# EAGLE board PIC32 (EAGLE 9.3.0)
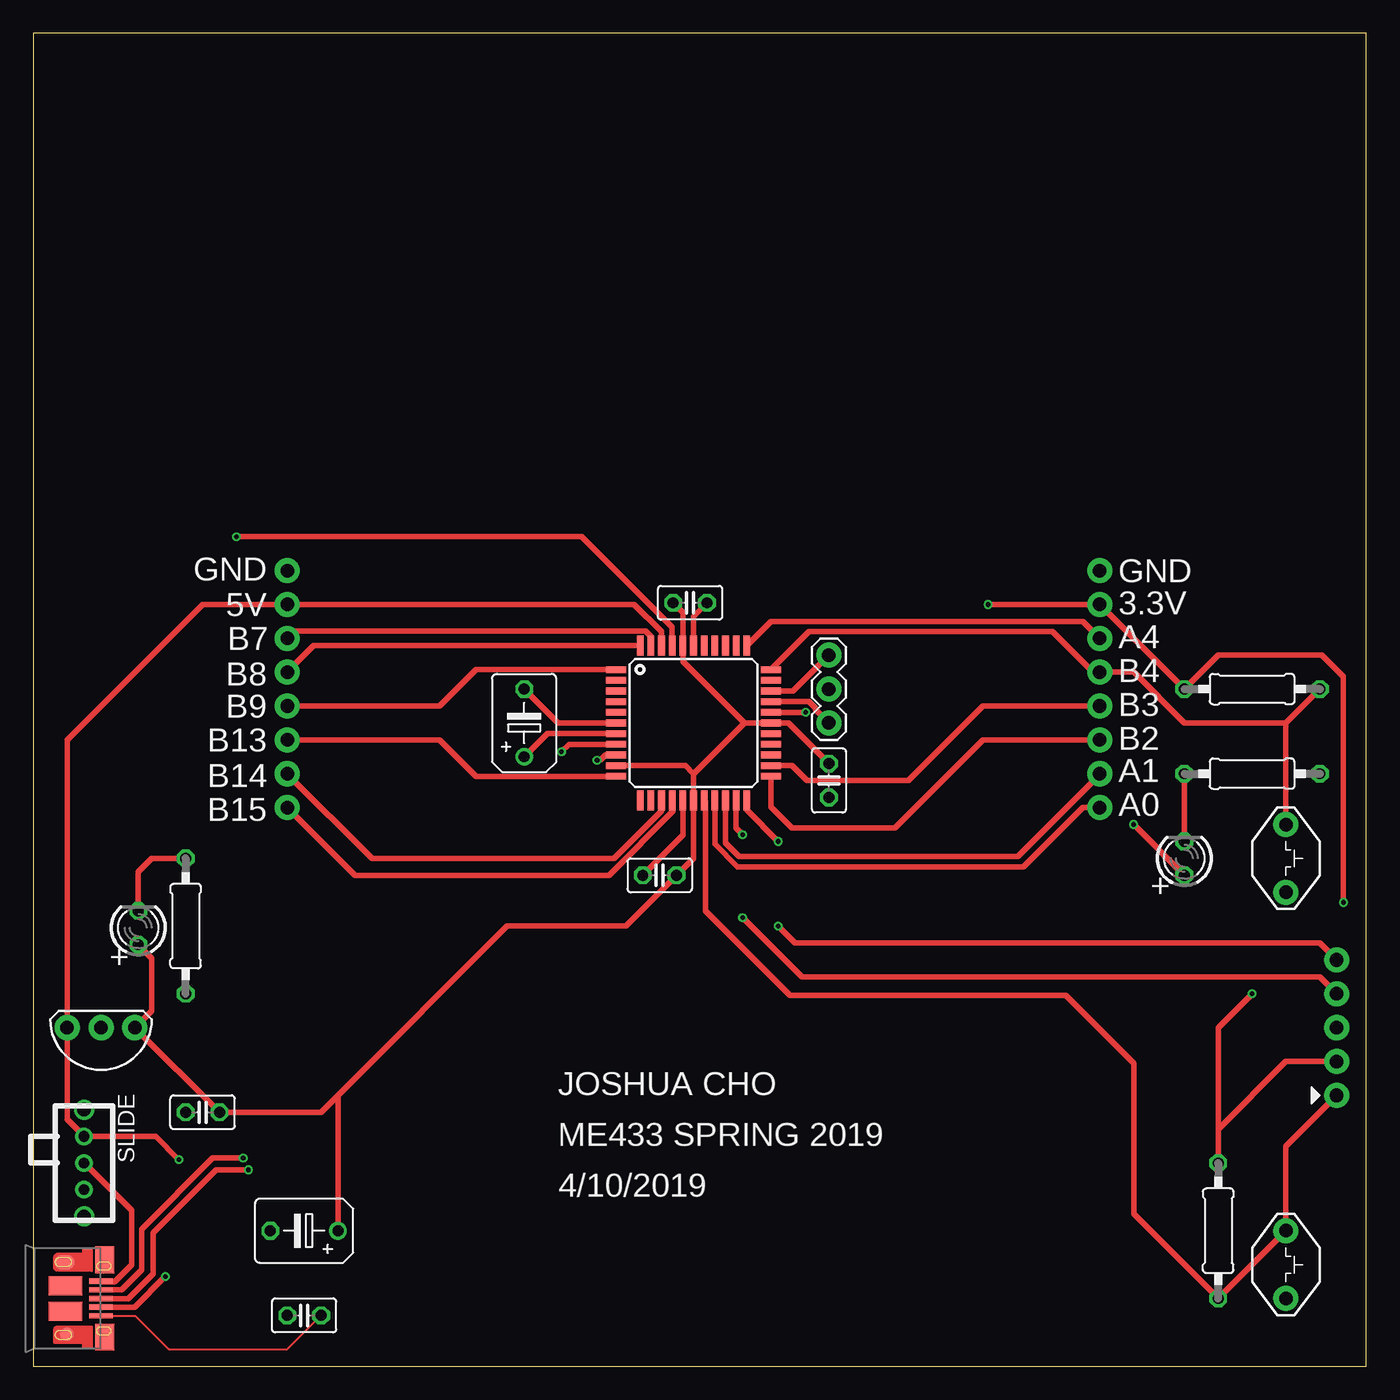
[diagram p0: board, top side]
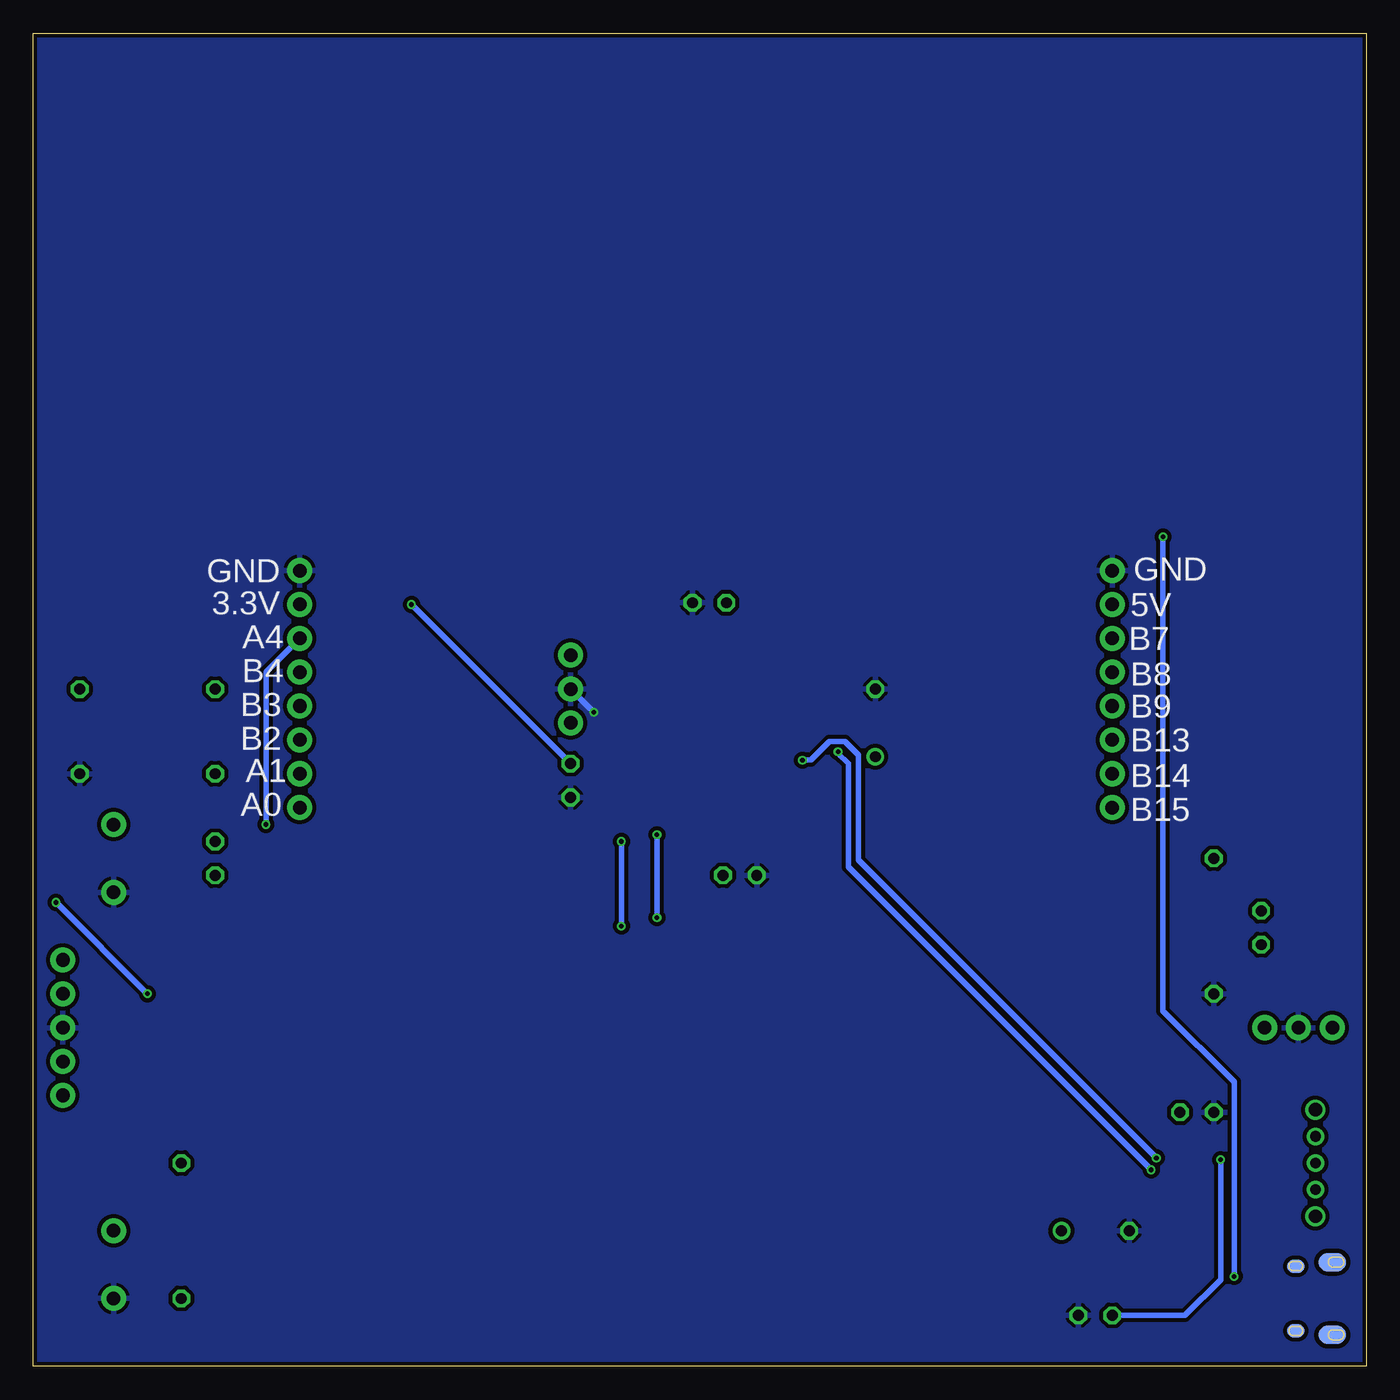
[diagram p1: board, bottom side, seen from below]

Size 100 x 100 mm. Coordinates in mm from the lower left corner, seen from the top.
Outline: 0,0 100,0 100,100 0,100 0,0
Copper layers (1*16): Top 0.035mm / dielectric 1.5mm / Bottom 0.035mm
Design rules "SeeedStudio_2layer_DRU_no_angle_20140221": minimum track width 6mil, minimum drill 12mil, track to track 6mil, track to pad 6mil, pad to pad 6mil, via to via 6mil, smd to smd 0mil, copper to edge 10mil, drill to drill 10mil, minimum pad ring 10mil, minimum via ring 6mil, stop-mask expansion 2mil, vias tented up to drill 100mil, thermal gap 10mil

## Footprints (pad centres in the part's own frame; a part is rotated, then mirrored left to right if it is on the bottom)
C025-025X050 = drill 0.813 octagon: 1 -1.27,0; 2 1.27,0
B45181B = drill 0.813: + -2.54,0 | drill 0.813 octagon: - 2.54,0
USB-MICROB-PTH-MILL = smd 0.4 x 1.75: D+ 0,0; D- -0.65,0; GND 1.3,0; ID 0.65,0; VBUS -1.3,0 | smd 2 x 1.46: SHIELD -2.9,0.275; SHIELD2 2.9,0.275 | smd 1.425 x 2.5: SHIELD3 -0.963,-2.675; SHIELD4 0.963,-2.675 | smd 1.4 x 2.1 bottom: SHIELD5 -2.731,-2.531; SHIELD7 2.729,-2.531 | smd 1 x 1: SHIELD6 2.7,-2.575 | smd 1.1 x 1.5: SHIELD8 -2.731,-2.731 | smd 1 x 1.3 bottom: SHIELD9 -2.43,0.195; SHIELD10 2.43,0.195
LED3MM = drill 0.813 octagon: A -1.27,0; K 1.27,0
0207/10 = drill 0.813 octagon: 1 -5.08,0; 2 5.08,0
TQFP44 = smd 1.5 x 0.5: 1 -5.8,4; 2 -5.8,3.2; 3 -5.8,2.4; 4 -5.8,1.6; 5 -5.8,0.8; 6 -5.8,0; 7 -5.8,-0.8; 8 -5.8,-1.6; 9 -5.8,-2.4; 10 -5.8,-3.2; 11 -5.8,-4; 23 5.8,-4; 24 5.8,-3.2; 25 5.8,-2.4; 26 5.8,-1.6; 27 5.8,-0.8; 28 5.8,0; 29 5.8,0.8; 30 5.8,1.6; 31 5.8,2.4; 32 5.8,3.2; 33 5.8,4 | smd 0.5 x 1.5: 12 -4,-5.8; 13 -3.2,-5.8; 14 -2.4,-5.8; 15 -1.6,-5.8; 16 -0.8,-5.8; 17 0,-5.8; 18 0.8,-5.8; 19 1.6,-5.8; 20 2.4,-5.8; 21 3.2,-5.8; 22 4,-5.8; 34 4,5.8; 35 3.2,5.8; 36 2.4,5.8; 37 1.6,5.8; 38 0.8,5.8; 39 0,5.8; 40 -0.8,5.8; 41 -1.6,5.8; 42 -2.4,5.8; 43 -3.2,5.8; 44 -4,5.8
SLIDE = drill 0.8: 1 -2,0; 2 0,0; 3 2,0 | drill 1: P$1 -4,0; P$2 4,0
L4931 = drill 1.016 pad 1.88: 1.VIN -2.54,0; 2.GND 0,0; 3.VOUT 2.54,0
PB = drill 1.016 pad 1.88: 1 -2.54,0; 2 2.54,0
1X03 = drill 1.016 pad 1.88: 1 0,0; 2 2.54,0; 3 5.08,0
1X08 = drill 1.016 pad 1.88: 1 0,0; 2 2.54,0; 3 5.08,0; 4 7.62,0; 5 10.16,0; 6 12.7,0; 7 15.24,0; 8 17.78,0
1X05 = drill 1.016 pad 1.88: 1 0,0; 2 2.54,0; 3 5.08,0; 4 7.62,0; 5 10.16,0

## Placement (x,y rotation side)
C1  0.1uF  [C025-025X050]  59.69,43.94 270 top
C2  0.1uF  [C025-025X050]  46.99,36.83 0 top
C3  10uF  [B45181B]  20.32,10.16 180 top
C4  0.1uF  [C025-025X050]  20.32,3.81 180 top
C5  0.1uF  [C025-025X050]  12.7,19.05 180 top
C6  10uF  [B45181B]  36.83,48.26 90 top
C7  0.1uF  [C025-025X050]  49.28,57.28 180 top
J1  [USB-MICROB-PTH-MILL]  5.08,5.08 270 top
LED1  RED  [LED3MM]  7.87,32.89 90 top
LED2  GREEN  [LED3MM]  86.36,38.1 90 top
R1  330  [0207/10]  11.43,33.02 90 top
R2  330  [0207/10]  91.44,44.45 180 top
R3  10k  [0207/10]  88.9,10.16 90 top
R4  10k  [0207/10]  91.44,50.8 180 top
U$1  PIC32MX270F256D  [TQFP44]  49.53,48.26 0 top
U$2  SLIDE  [SLIDE]  3.81,15.24 90 top
U$3  L4931  [L4931]  5.08,25.4 0 top
U$4  RESET  [PB]  93.98,7.62 270 top
U$5  USER  [PB]  93.98,38.1 270 top
U$6  8MHz OSC  [1X03]  59.69,48.26 90 top
U$7  CONN_08  [1X08]  80.01,41.91 90 top
U$8  CONN_08  [1X08]  19.05,41.91 90 top
U$9  SNAP  [1X05]  97.79,20.32 90 top

## Library data of the parts
C1-C7 = PIC32; SPICEPREFIX: C
J1 = PIC32; PROD_ID: CONN-13711
LED1 LED2 U$1-U$9 = PIC32
R1-R4 = PIC32; SPICEPREFIX: R

## Nets
+3V3: C1.1 C2.2 C3.+ C5.1 C7.2 LED1.A R3.2 R4.2 U$1.10 U$1.17 U$1.28 U$1.40 U$3.3.VOUT U$7.7 U$9.2
+5V: C4.2 U$1.42 U$2.3 U$3.1.VIN U$8.7
A0: U$1.19 U$7.1
A1: U$1.20 U$7.2
A4: LED2.A U$1.34 U$7.6
B2: U$1.23 U$7.3
B3: U$1.24 U$7.4
B4: R4.1 U$1.33 U$5.1 U$7.5
B7: U$1.43 U$8.6
B8: U$1.44 U$8.5
B9: U$1.1 U$8.4
B13: U$1.11 U$8.3
B14: U$1.14 U$8.2
B15: U$1.15 U$8.1
D+: J1.D+ U$1.8
D-: J1.D- U$1.9
GND: C1.2 C2.1 C3.- C4.1 C5.2 C6.- C7.1 J1.GND R1.1 R2.1 U$1.6 U$1.16 U$1.29 U$1.39 U$3.2.GND U$4.2 U$5.2 U$6.2 U$7.8 U$8.8 U$9.3
MCLR: R3.1 U$1.18 U$4.1 U$9.1
N$1: U$1.30 U$6.1
N$2: J1.VBUS U$2.2
N$3: LED1.K R1.2
N$4: U$1.31 U$6.3
N$5: C6.+ U$1.7
N$6: LED2.K R2.2
PGC: U$1.22 U$9.5
PGD: U$1.21 U$9.4
USBID: J1.ID U$1.41

## Tracks (layer width: path | path; a pad name or v marks a point on that pad's centre or on a via)
+3V3  (via drill 0.35)
  Top 0.406: U$9.2 93.98,22.86 88.9,17.78 R3.2 88.9,25.4 v91.44,27.94 | 22.86,20.32 C3.+ | LED1.A 8.89,30.61 8.89,26.67 U$3.3.VOUT C5.1 21.59,19.05 22.86,20.32 | 22.86,20.32 35.56,33.02 44.45,33.02 C2.2 49.53,38.1 U$1.17 49.53,44.45 | 49.53,44.45 53.34,48.26 | 53.34,48.26 U$1.28 56.64,48.26 C1.1 | 53.34,48.26 48.73,52.87 U$1.40 48.73,56.55 C7.2 | 49.53,44.45 48.92,45.06 U$1.10 | v98.3,34.8 98.3,51.73 96.69,53.34 88.9,53.34 R4.2 U$7.7 v71.63,57.15
  Bottom 0.406: v91.44,27.94 v98.3,34.8 | C1.1 v71.63,57.15
+5V  (via drill 0.35)
  Top 0.406: U$1.42 47.13,55.1 45.09,57.15 U$8.7 12.7,57.15 2.54,46.99 U$3.1.VIN 2.54,18.51 U$2.3 9.18,17.24 v10.92,15.49
  Bottom 0.406: v10.92,15.49 10.92,6.48 13.59,3.81 C4.2
A0
  Top 0.406: U$7.1 78.74,41.91 74.3,37.47 52.83,37.47 51.13,39.17 U$1.19
A1
  Top 0.406: U$1.20 51.93,39.26 52.96,38.23 73.86,38.23 80.01,44.38 U$7.2
A4  (via drill 0.35)
  Top 0.406: U$1.34 55.35,55.88 78.74,55.88 U$7.6 | LED2.A v82.55,40.64
  Bottom 0.406: v82.55,40.64 82.55,52.07 U$7.6
B2
  Top 0.406: U$1.23 55.33,41.97 56.92,40.39 64.64,40.39 71.25,46.99 U$7.3
B3
  Top 0.406: U$1.24 56.92,45.06 58.04,43.94 65.66,43.94 71.25,49.53 U$7.4
B4
  Top 0.406: U$5.1 93.98,48.26 | 93.98,48.26 R4.1 | 93.98,48.26 86.36,48.26 82.55,52.07 U$7.5 79.5,52.07 76.45,55.12 58.19,55.12 U$1.33
B7
  Top 0.406: 46.33,54.76 46.35,54.74 | U$8.6 19.61,55.17 45.93,55.17 46.14,54.96 46.33,54.76 | 46.33,54.76 U$1.43
B8
  Top 0.406: U$8.5 21.04,54.06 U$1.44
B9
  Top 0.406: U$1.1 33.21,52.26 30.48,49.53 U$8.4
B13
  Top 0.406: U$1.11 33.21,44.26 30.48,46.99 U$8.3
B14
  Top 0.406: U$8.2 25.4,38.1 43.56,38.1 47.12,41.66 47.12,42.45 U$1.14
B15
  Top 0.406: U$8.1 24.13,36.83 43.18,36.83 48.01,41.66 48.01,42.38 U$1.15
D+  (via drill 0.35)
  Top 0.406: J1.D+ 5.11,5.05 7.12,5.05 8.99,6.92 8.99,10 13.72,14.73 v16.13,14.73 | v39.62,46.1 40.18,46.66 U$1.8
  Bottom 0.406: v16.13,14.73 38.86,37.47 38.86,45.21 39.62,45.97 v39.62,46.1
D-  (via drill 0.35)
  Top 0.406: J1.D- 6.62,5.73 8.13,7.24 8.13,10.29 13.46,15.62 v15.75,15.62 | v42.29,45.47 42.55,45.47 42.93,45.85 43.72,45.85 U$1.9
  Bottom 0.406: v15.75,15.62 38.1,37.97 38.1,45.85 39.12,46.86 40.26,46.86 41.66,45.47 v42.29,45.47
GND  (via drill 0.35)
  Top 0.152: J1.GND 7.65,3.78 10.16,1.27 19.05,1.27 C4.1
  Top 0.406: U$1.6 39.37,48.26 C6.- | v57.95,49.06 U$1.29 | C7.1 49.53,56.26 U$1.39 | C2.1 48.73,39.84 U$1.16
  Bottom 0.406: U$6.2 v57.95,49.06
  pour Bottom (isolate 0.305): 0,100.33 0,0 100.33,0 100.33,100.33
MCLR
  Top 0.406: U$1.18 50.42,42.37 50.42,34.16 56.77,27.81 77.47,27.81 82.55,22.73 82.55,11.43 R3.1 U$4.1 93.98,16.51 U$9.1
N$1
  Top 0.406: U$6.1 58.68,49.27 58.68,49.36 58.19,49.86 U$1.30
N$2
  Top 0.406: U$2.2 7.37,11.68 7.37,7.62 6.1,6.35 5.11,6.35 J1.VBUS
N$3
  Top 0.406: R1.2 8.89,38.1 7.87,37.08 LED1.K
N$4
  Top 0.406: U$6.3 57.01,50.66 U$1.31
N$5
  Top 0.406: U$1.7 38.57,47.46 C6.+
N$6
  Top 0.406: R2.2 LED2.K
PGC  (via drill 0.35)
  Top 0.406: U$9.5 96.52,31.75 57.15,31.75 v55.88,33.02 | v55.88,39.37 53.53,41.72 U$1.22
  Bottom 0.406: v55.88,33.02 v55.88,39.37
PGD  (via drill 0.35)
  Top 0.406: U$9.4 96.52,29.21 57.66,29.21 v53.21,33.66 | v53.21,39.88 52.7,40.39 52.7,41.91 52.73,41.94 U$1.21
  Bottom 0.406: v53.21,39.88 v53.21,33.66
USBID  (via drill 0.35)
  Top 0.406: U$1.41 47.93,55.45 41.15,62.23 v15.24,62.23 | v9.91,6.73 7.61,4.43 J1.ID
  Bottom 0.406: v15.24,62.23 15.24,26.67 9.91,21.34 v9.91,6.73

## Text on the board
tPlace: GND | GND | 5V | 3.3V | B7 | A4 | B8 | B4 | B9 | B3 | B13 | B2 | B14 | A1 | B15 | A0 | + | + | JOSHUA CHO | ME433 SPRING 2019 | 4/10/2019
bPlace: GND | GND | 5V | 3.3V | B7 | A4 | B8 | B4 | B9 | B3 | B13 | B2 | B14 | A1 | B15 | A0